# Altium PCB AudioHarmonizer.PcbDoc
Units mm, origin at the board's own origin, x right, y up, seen from the top; angles counter-clockwise.
Board outline 140.5 x 73 mm, 2 copper layers (Top Layer, Bottom Layer), stack 1.671 mm thick; 59 components, 39 nets, 253 pads, 55 vias.
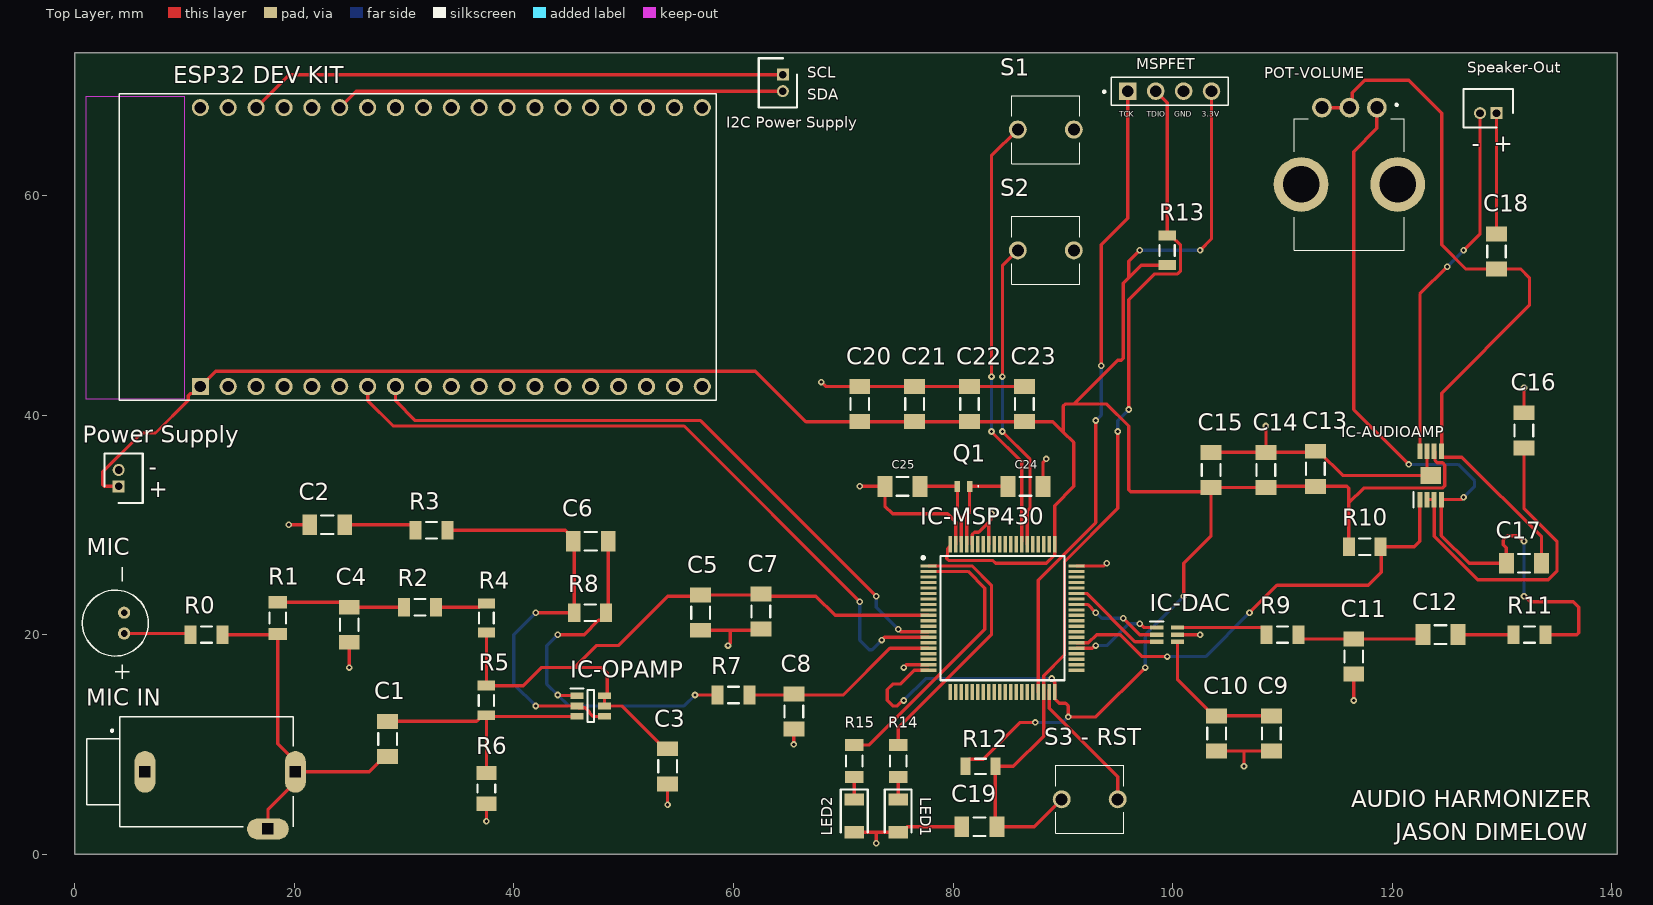
[diagram p0: Top Layer view]
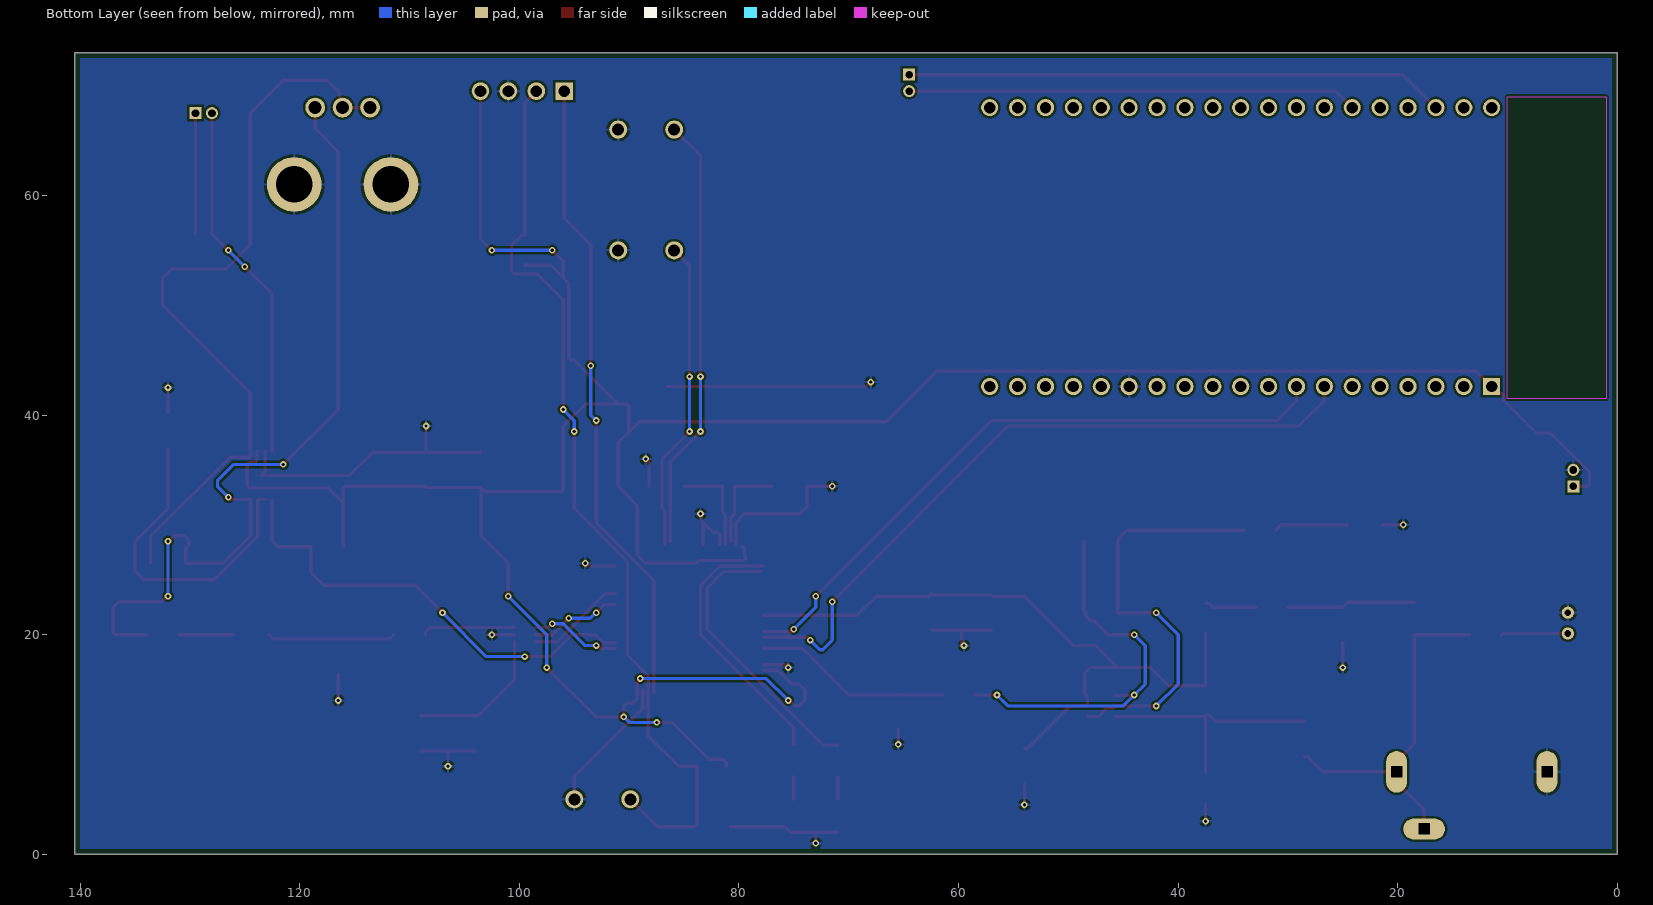
[diagram p1: Bottom Layer view, seen from below]

## Layer stack, top to bottom
Top Solder: solder mask 0.0102, Solder Resist, Dk 3.5
Top Layer: signal copper 0.0356
Dielectric 1: dielectric 1.6, FR-4, Dk 4.8
Bottom Layer: signal copper 0.0356
Bottom Solder: solder mask 0.0102, Solder Resist, Dk 3.5

## Board outline
0,0 0,73 140.5,73 140.5,0

## Design rules (kind name [scope] priority, off if disabled: settings)
Clearance [All] p1: gap=0.2 ignorepadtopadclearanceinfootprint=TRUE
Height [All] p1: minheight=0 maxheight=25.6 prefheight=12.7
HoleSize [All] p1: absolutevalues=TRUE maxlimit=3.35 minlimit=0.025 maxpercent=80.000 minpercent=20.000
MinimumSolderMaskSliver [All] p1: minsoldermaskwidth=0.046
PolygonConnect [All] p1: connectstyle=Relief reliefconductorwidth=0.254 reliefentries=4 polygonreliefangle="90 Angle" airgapwidth=0.254
RoutingVias [All] p1: holewidth=0.3 width=0.6 viastyle="Through Hole" minholewidth=0.3 minwidth=0.6 maxholewidth=0.3 maxwidth=0.6
SilkToSolderMaskClearance [IsPad] p1: minsilkscreentomaskgap=0.25 clearancetoexposedcopper=TRUE
SolderMaskExpansion [All] p1: expansion=0.102 istentingtop=FALSE
Width [All] p1: maxlimit=1 minlimit=0.3 preferedwidth=0.5
26 further rules are at their usual default settings.

## Components (designator, comment, footprint, x,y, rotation, side; value= is the part's Value field where it differs from the comment)
C1 "0.15u" CAPC1206(3216)170_M 28.5,10.5 r90 top value=6.8nF
C2 "0.47u" CAPC1206(3216)170_M 23,30 r0 top value=6.8nF
C3 "0.47u" CAPC1206(3216)170_M 54,8 r270 top value=6.8nF
C4 "4.7u" CAPC1206(3216)170_M 25,20.9 r270 top value=6.8nF
C5 "4.7u" CAPC1206(3216)170_M 57,22 r270 top value=6.8nF
C6 "51p" CAPC1206(3216)170_M 47,28.5 r0 top value=6.8nF
C7 "0.1u" CAPC1206(3216)170_M 62.5,22.1 r270 top value=6.8nF
C8 "0.015u" CAPC1206(3216)170_M 65.5,13 r270 top value=6.8nF
C9 "0.1u" CAPC1206(3216)170_M 109,11 r270 top value=6.8nF
C10 "10u" CAPC1206(3216)170_M 104,11 r270 top value=6.8nF
C11 "0.082u" CAPC1206(3216)170_M 116.5,18 r270 top value=6.8nF
C12 "0.56u" CAPC1206(3216)170_M 124.4,20 r0 top value=6.8nF
C13 "10u" CAPC1206(3216)170_M 113,35.1 r90 top value=6.8nF
C14 "0.1u" CAPC1206(3216)170_M 108.5,35 r90 top value=6.8nF
C15 "2.2u" CAPC1206(3216)170_M 103.5,35 r90 top value=6.8nF
C16 "2.2u" CAPC1206(3216)170_M 132,38.6 r90 top value=6.8nF
C17 "5p" CAPC1206(3216)170_M 132,26.5 r0 top value=6.8nF
C18 "47u" CAPC1206(3216)170_M 129.5,54.9 r90 top value=6.8nF
C19 "1n" CAPC1206(3216)170_M 82.4,2.5 r180 top value=6.8nF
C20 "100n" CAPC1206(3216)170_M 71.5,41 r90 top value=6.8nF
C21 "100n" CAPC1206(3216)170_M 76.5,41 r90 top value=6.8nF
C22 "100n" CAPC1206(3216)170_M 81.5,41 r90 top value=6.8nF
C23 "10u" CAPC1206(3216)170_M 86.5,41 r90 top value=6.8nF
C24 "22p" CAPC1206(3216)170_M 86.6,33.5 r0 top value=6.8nF
C25 "22p" CAPC1206(3216)170_M 75.4,33.5 r180 top value=6.8nF
"ESP32 DEV KIT" "ESP32-DEVKITC-32D" MODULE_ESP32-DEVKITC-32D 31.2,55.3 r90 top
"I2C Power Supply" "B2B-ZR_LF__SN_" SHDR2W50P0X150_1X2_450X350X450P 64.5,71 r90 top
IC-AUDIOAMP "TPA301DGN" SOP65P490X110-9N 123.5,34.5 r90 top
IC-DAC "DAC8311IDCKT" SOT65P210X110-6N 99.5,20 r0 top
IC-MSP430 "MSP430FR59941IPN" QFP50P1400X1400X160-80N 84.5,21.5 r0 top
IC-OPAMP "TLV2760IDBVTG4" SOT95P280X145-6N 47,13.5 r0 top
LED1 "HSMH-C150" LEDC3216X120N 75,3.5 r270 top
LED2 "HSMH-C150" LEDC3216X120N 71,3.5 r270 top
MIC "POM-2742P-2-R" MIC_POM-2742P-2-R 3.7,21.05 r270 top
"MIC IN" "MJ-3536N" CUI_MJ-3536N 12,7.5 r0 top
MSPFET "PPTC041LFBN-RC" SULLINS_PPTC041LFBN-RC 99.73,69.5 r0 top (schematic designator J1)
POT-VOLUME "PTV09A-4025F-B104" PTV09A4025FB104 118.6,68 r180 top (schematic designator POT)
"Power Supply" "B2B-ZR_LF__SN_" SHDR2W50P0X150_1X2_450X350X450P 4,33.5 r270 top
Q1 "ABS05-32.768KHZ-X-3-T3" ABS0532768KHZX3T3 80.95,33.5 r180 top (schematic designator "Q1 LF XTAL")
R0 "0" RESC3216X60X45NL10T20 12,20 r180 top
R1 "8.2K" RESC3216X60X45NL10T20 18.5,21.5 r90 top
R2 "470" RESC3216X60X45NL10T20 31.45,22.5 r0 top
R3 "820" RESC3216X60X45NL10T20 32.5,29.5 r0 top
R4 "3K" RESC3216X70X50LL05T20 37.5,21.5 r90 top
R5 "47K" RESC3216X60X45LL10T20 37.5,14 r90 top
R6 "51K" RESC3216X70X50NL20T25 37.5,6 r90 top
R7 "820" RESC3216X60X45NL10T20 60,14.5 r180 top
R8 "200K" RESC3216X60X45NL10T20 46.95,22 r0 top
R9 "100" RESC3216X60X45NL10T20 110,20 r0 top
R10 "100K" RESC3216X60X45NL10T20 117.5,28 r0 top
R11 "30K" RESC3216X60X45NL10T20 132.5,20 r0 top
R12 "47K" RESC3216X60X45LL10T20 82.5,8 r180 top
R13 "47K" RESC3216X60X45LL10T20 99.5,55 r270 top
R14 "470" RESC3216X60X45NL10T20 75,8.5 r270 top
R15 "470" RESC3216X60X45NL10T20 71,8.5 r270 top
S1 "FSM2JRT" FSM2JRT 85.895,66 r270 top
S2 "FSM2JRT" FSM2JRT 85.895,55 r270 top
"S3 - RST" "FSM2JRT" FSM2JRT 89.895,5 r270 top
Speaker-Out "B2B-ZR_LF__SN_" SHDR2W50P0X150_1X2_450X350X450P 129.5,67.5 r0 top

## Footprints (in the part's own frame and the unit in brackets; to place one, negate y for a bottom-side part, rotate by r counter-clockwise, add the part's x,y. Pads: shape width x height; smd on the part's side, far side on the other; paste and mask are expansions set on the pad)
ABS0532768KHZX3T3 [mm]
  rect 0.5x1 smd: 1(-0.55,0) 2(0.55,0)
  silkscreen extent -1.4,-0.05 -1.3,0.05, body extent -0.8,-0.5 0.8,0.5, height 0.6
CAPC1206(3216)170_M [mm] "Chip Capacitor, Body 3.2x1.6mm, Height 1.7mm, IPC Low Density"
  rect 1.35x1.9 smd: 1(-1.6,0) 2(1.6,0)
  silkscreen extent -0.55,-0.85 0.55,0.85, body extent -1.7,-0.9 1.7,0.9, height 1.7
CUI_MJ-3536N [mm]
  oval 1.9x3.8 hole 1 square: 1(-5.6,0) 2(8.1,0)
  oval 3.8x1.9 hole 1 square: 3(5.6,-5.2)
  silkscreen extent -10.9,-5 7.9,5
FSM2JRT [mm]
  round 1.638 hole 1.092: 1(0,0) 2(0,5.105)
  silkscreen extent -3.1,-0.55 3.1,5.65, body extent -3.1,-0.55 3.1,5.65, height 4.3
LEDC3216X120N [mm]
  rect 1.1x1.75 smd: 1(-1.5,0) 2(1.5,0)
  silkscreen extent -2.4,-1.23 1.5,1.23
MIC_POM-2742P-2-R [mm]
  round 1.108 hole 0.6: N(-0.95,0.8) P(0.95,0.8)
  silkscreen extent -5.08,-3 5.08,3, body extent -3,-1.45 3,4.15, height 3
MODULE_ESP32-DEVKITC-32D [mm]
  rect 1.56x1.56 hole 1.04: 1(-12.7,19.76)
  round 1.56 hole 1.04: 2(-12.7,17.22) 3(-12.7,14.68) 4(-12.7,12.14) 5(-12.7,9.6) 6(-12.7,7.06) 7(-12.7,4.52) 8(-12.7,1.98) 9(-12.7,-0.56) 10(-12.7,-3.1) 11(-12.7,-5.64) 12(-12.7,-8.18) 13(-12.7,-10.72) 14(-12.7,-13.26) 15(-12.7,-15.8) 16(-12.7,-18.34) 17(-12.7,-20.88) 18(-12.7,-23.42) 19(-12.7,-25.96) 20(12.7,19.76) 21(12.7,17.22) 22(12.7,14.68) 23(12.7,12.14) 24(12.7,9.6) 25(12.7,7.06) 26(12.7,4.52) 27(12.7,1.98) 28(12.7,-0.56) 29(12.7,-3.1) 30(12.7,-5.64) 31(12.7,-8.18) 32(12.7,-10.72) 33(12.7,-13.26) 34(12.7,-15.8) 35(12.7,-18.34) 36(12.7,-20.88) 37(12.7,-23.42) 38(12.7,-25.96)
  silkscreen extent -13.95,-27.25 13.95,27.15, body extent -13.97,-24.8 13.97,30.3, height 3.25
PTV09A4025FB104 [mm]
  round 1.8 hole 1.2: 1(0,0) 2(2.5,0) 3(5,0)
  round 4.98 hole 3.32: MH1(-1.9,7) MH2(6.9,7)
  silkscreen extent -2.5,-0.35 7.5,13, body extent -3.45,-0.5 8.46,13, height 25.6
QFP50P1400X1400X160-80N [mm]
  rect 1.475x0.3 smd: 1(-6.738,4.75) 2(-6.738,4.25) 3(-6.738,3.75) 4(-6.738,3.25) 5(-6.738,2.75) 6(-6.738,2.25) 7(-6.738,1.75) 8(-6.738,1.25) 9(-6.738,0.75) 10(-6.738,0.25) 11(-6.738,-0.25) 12(-6.738,-0.75) 13(-6.738,-1.25) 14(-6.738,-1.75) 15(-6.738,-2.25) 16(-6.738,-2.75) 17(-6.738,-3.25) 18(-6.738,-3.75) 19(-6.738,-4.25) 20(-6.738,-4.75) 41(6.738,-4.75) 42(6.738,-4.25) 43(6.738,-3.75) 44(6.738,-3.25) 45(6.738,-2.75) 46(6.738,-2.25) 47(6.738,-1.75) 48(6.738,-1.25) 49(6.738,-0.75) 50(6.738,-0.25) 51(6.738,0.25) 52(6.738,0.75) 53(6.738,1.25) 54(6.738,1.75) 55(6.738,2.25) 56(6.738,2.75) 57(6.738,3.25) 58(6.738,3.75) 59(6.738,4.25) 60(6.738,4.75)
  rect 0.3x1.475 smd: 21(-4.75,-6.738) 22(-4.25,-6.738) 23(-3.75,-6.738) 24(-3.25,-6.738) 25(-2.75,-6.738) 26(-2.25,-6.738) 27(-1.75,-6.738) 28(-1.25,-6.738) 29(-0.75,-6.738) 30(-0.25,-6.738) 31(0.25,-6.738) 32(0.75,-6.738) 33(1.25,-6.738) 34(1.75,-6.738) 35(2.25,-6.738) 36(2.75,-6.738) 37(3.25,-6.738) 38(3.75,-6.738) 39(4.25,-6.738) 40(4.75,-6.738) 61(4.75,6.738) 62(4.25,6.738) 63(3.75,6.738) 64(3.25,6.738) 65(2.75,6.738) 66(2.25,6.738) 67(1.75,6.738) 68(1.25,6.738) 69(0.75,6.738) 70(0.25,6.738) 71(-0.25,6.738) 72(-0.75,6.738) 73(-1.25,6.738) 74(-1.75,6.738) 75(-2.25,6.738) 76(-2.75,6.738) 77(-3.25,6.738) 78(-3.75,6.738) 79(-4.25,6.738) 80(-4.75,6.738)
  silkscreen extent -7.35,-5.65 5.65,5.65, body extent -7,-0.79 7,0.77, height 7
RESC3216X60X45LL10T20 [mm] "Chip Resistor, 2-Leads, Body 3.20x1.60mm, IPC High Density"
  rect 0.9x1.6 smd: 1(-1.35,0) 2(1.35,0)
  silkscreen extent -0.5,-0.7 0.5,0.7, body extent -1.65,-0.85 1.65,0.85, height 0.6
RESC3216X60X45NL10T20 [mm] "Chip Resistor, 2-Leads, Body 3.20x1.60mm, IPC Medium Density"
  rect 1.1x1.7 smd: 1(-1.45,0) 2(1.45,0)
  silkscreen extent -0.5,-0.75 0.5,0.75, body extent -1.65,-0.85 1.65,0.85, height 0.6
RESC3216X70X50LL05T20 [mm] "Chip Resistor, 2-Leads, Body 3.20x1.60mm, IPC High Density"
  rect 0.9x1.55 smd: 1(-1.325,0) 2(1.325,0)
  silkscreen extent -0.5,-0.67 0.5,0.68, body extent -1.63,-0.82 1.62,0.82, height 0.7
RESC3216X70X50NL20T25 [mm] "Chip Resistor, 2-Leads, Body 3.20x1.60mm, IPC Medium Density"
  rect 1.3x1.8 smd: 1(-1.4,0) 2(1.4,0)
  silkscreen extent -0.35,-0.8 0.35,0.8, body extent -1.7,-0.9 1.7,0.9, height 0.7
SHDR2W50P0X150_1X2_450X350X450P [mm]
  rect 1.1x1.1 hole 0.7: 1(0,0)
  round 1.1 hole 0.7: 2(-1.5,0)
  silkscreen extent -3,-1.3 1.5,2.2, body extent -3,-1.75 1.5,1.75, height 4.5
SOP65P490X110-9N [mm]
  rect 1.4x0.45 smd: 1(-2.2,0.975) 2(-2.2,0.325) 3(-2.2,-0.325) 4(-2.2,-0.975) 5(2.2,-0.975) 6(2.2,-0.325) 7(2.2,0.325) 8(2.2,0.975)
  rect 1.57x1.89 smd: 9(0,0)
  silkscreen extent -2.9,1.55 -1.5,1.55, body extent -2.45,-1.5 2.45,1.5, height 1.07
SOT65P210X110-6N [mm]
  rect 1.2x0.4 smd: 1(-0.95,0.65) 2(-0.95,0) 3(-0.95,-0.65) 4(0.95,-0.65) 5(0.95,0) 6(0.95,0.65)
  silkscreen extent -1.55,1.2 -0.35,1.2, body extent -1.05,-0.99 1.05,1.01, height 1
SOT95P280X145-6N [mm]
  rect 1.2x0.6 smd: 1(-1.25,0.95) 2(-1.25,0) 3(-1.25,-0.95) 4(1.25,-0.95) 5(1.25,0) 6(1.25,0.95)
  silkscreen extent -1.85,-1.45 0.3,1.6, body extent -1.4,-1.45 1.4,1.45, height 1.2
SULLINS_PPTC041LFBN-RC [mm]
  rect 1.605x1.605 hole 1.07: 1(-3.81,0)
  round 1.605 hole 1.07: 2(-1.27,0) 3(1.27,0) 4(3.81,0)
  silkscreen extent -6.06,-1.27 5.33,1.27

## Part data
C1 C2 C3 C4 C5 C6 C7 C8 C9 C10 C11 C12 C13 C14 C15 C16 C17 C18 C19 C20 C21 C22 C23 C24 C25: library part CMP-1037-03299-1, "CAP 6.8nF 50V ±10% 1206 (3216 Metric) Thickness 1.7mm SMD", Case-EIA=1206, Case-Metric=3216, Rated Voltage="50 V", Tolerance=Â±10%, Max Thickness="1.7 mm", Technology=SMT
"ESP32 DEV KIT": "EVAL BOARD FOR ESP-WROOM-32", Package=None, Availability=Warning, Check_prices=https://www.snapeda.com/parts/ESP32-DEVKITC-32D/Espressif%20Systems/view-part/2777395/?ref=eda, MF="Espressif Systems", MP=ESP32-DEVKITC-32D, Price=None, Purchase-URL=https://pricing.snapeda.com/search/part/ESP32-DEVKITC-32D/?ref=eda, SnapEDA_Link=https://www.snapeda.com/parts/ESP32-DEVKITC-32D/Espressif%20Systems/view-part/2777395/?ref=snap
"I2C Power Supply" "Power Supply" Speaker-Out: "Connector", Arrow Part Number=B2B-ZR(LF)(SN), Manufacturer_Name="JST (JAPAN SOLDERLESS TERMINALS)", Arrow Price/Stock=https://www.arrow.com/en/products/b2b-zr-lf-sn/jst-manufacturing, Datasheet Link=https://componentsearchengine.com/Datasheets/2/B2B-ZR(LF)(SN).pdf, Height=4.5mm, Manufacturer_Part_Number=B2B-ZR(LF)(SN)
IC-AUDIOAMP: "Integrated Circuit", Manufacturer_Name="Texas Instruments", Mouser2 Part Number=595-TPA301DGN, Datasheet Link=http://www.ti.com/lit/gpn/tpa301, Height=1.1mm, Manufacturer_Part_Number=TPA301DGN, Mouser2 Price/Stock=https://www.mouser.com/Search/Refine.aspx?Keyword=595-TPA301DGN
IC-DAC: "Integrated Circuit", Manufacturer_Name="Texas Instruments", Mouser2 Part Number=595-DAC8311IDCKT, Datasheet Link=http://www.ti.com/lit/gpn/dac8311, Height=1.1mm, Manufacturer_Part_Number=DAC8311IDCKT, Mouser2 Price/Stock=https://www.mouser.com/Search/Refine.aspx?Keyword=595-DAC8311IDCKT
IC-MSP430: "Integrated Circuit", Manufacturer_Name="Texas Instruments", Mouser2 Part Number=595-MSP430FR59941IPN, Datasheet Link=http://www.ti.com/lit/gpn/MSP430FR59941, Height=1.6mm, Manufacturer_Part_Number=MSP430FR59941IPN, Mouser2 Price/Stock=https://www.mouser.com/Search/Refine.aspx?Keyword=595-MSP430FR59941IPN
IC-OPAMP: "Integrated Circuit", Manufacturer_Name="Texas Instruments", Mouser2 Part Number=595-TLV2760IDBVTG4, Datasheet Link=https://www.ti.com/lit/ds/symlink/tlv2760.pdf?ts=1637756368752&ref_url=https%253A%252F%252Fwww.google.com%252F, Height=1.45mm, Manufacturer_Part_Number=TLV2760IDBVTG4, Mouser2 Price/Stock=https://www.mouser.com/Search/Refine.aspx?Keyword=595-TLV2760IDBVTG4
LED1 LED2: "LED", Manufacturer_Name="Avago Technologies", Mouser2 Part Number=630-HSMH-C150, Height=1.2mm, Manufacturer_Part_Number=HSMH-C150, Mouser2 Price/Stock=https://www.mouser.com/Search/Refine.aspx?Keyword=630-HSMH-C150
MIC: "ELECTRET CONDENSER MICROPHONE 6MM DIA", Package=None, Check_prices=https://www.snapeda.com/parts/POM-2742P-2-R/PUI+Audio/view-part/?ref=eda, Digi-Key_Part_Number=668-1160-ND, MF="PUI Audio", MP=POM-2742P-2-R, Purchase-URL=https://pricing.snapeda.com/search/part/POM-2742P-2-R/?ref=eda, SnapEDA_Link=https://www.snapeda.com/parts/POM-2742P-2-R/PUI+Audio/view-part/?ref=snap
"MIC IN": "3.5 mm, Mono, Right Angle, Through Hole, Audio Jack Connector", Package=None, Availability=Unavailable, MF="CUI Devices", MP=MJ-3536N, Price=None, SnapEDA_Link=https://www.snapeda.com/parts/MJ-3536N/CUI%20Devices/view-part/559067/?ref=snap
MSPFET: "4 Position Header Connector Through Hole", Package=None, Availability=Warning, Check_prices=https://www.snapeda.com/parts/PPTC041LFBN-RC/Sullins%20Connector%20Solutions/view-part/285917/?ref=eda, MF="Sullins Connector", MP=PPTC041LFBN-RC, Price=None, Purchase-URL=https://pricing.snapeda.com/search/part/PPTC041LFBN-RC/?ref=eda, SnapEDA_Link=https://www.snapeda.com/parts/PPTC041LFBN-RC/Sullins%20Connector%20Solutions/view-part/285917/?ref=snap
POT-VOLUME: "Variable Resistor", Manufacturer_Name=Bourns, Mouser2 Part Number=652-PTV09A4025FB104, Datasheet Link=https://componentsearchengine.com//PTV09A-4025F-B104.pdf, Height=25.5mm, Manufacturer_Part_Number=PTV09A-4025F-B104, Mouser2 Price/Stock=https://www.mouser.com/Search/Refine.aspx?Keyword=652-PTV09A4025FB104
Q1: "Crystal or Oscillator", Manufacturer_Name=ABRACON, Datasheet Link=https://abracon.com/Resonators/ABS05.pdf, Height=0.5mm, Manufacturer_Part_Number=ABS05-32.768KHZ-X-3-T3
R0 R1 R2 R3 R7 R8 R9 R10 R11 R14 R15: library part CMP-1014-00812-2, Manufacturer="Vishay Dale", Part Number=CRCW1206470KFKEA
R4: library part CMP-1014-00562-2, Manufacturer=Panasonic, Part Number=ERJ8ENF3001V
R5 R12 R13: library part CMP-2003-02213-1, Manufacturer="Vishay Dale", Part Number=CRCW120647K0FKEA
R6: library part CMP-2003-04477-1, Manufacturer=Panasonic, Part Number=ERA8AEB513V
S1 S2 "S3 - RST": "Switch (2-Pin Push)", Manufacturer_Name="TE Connectivity", Height=4.3mm, Manufacturer_Part_Number=FSM2JRT

## Via types
v1: diameter 0.6, hole 0.3, Top Layer to Bottom Layer, tented both sides, 55 vias

## Nets (pads, with @x,y where several pads share a name; then routed paths per layer and width w, separated by ;. In a path a pad name is that pad's centre, name@x,y a point inside that pad or via, vN(x,y) a via of type N, cw(c..) or ccw(c..) an arc to the next point about the centre after c; other vN are vias at no path point)
GND: "ESP32 DEV KIT.14" "MIC IN.1" "Power Supply.2" "S3 - RST.2" C2.1 C3.2 C4.2 C5.2 C7.2 C8.2 C9.2 C10.2 C11.2 C13.2 C14.2 C15.2 C16.2 C19.2 C20.2 C21.2 C22.2 C23.2 C24.2 C25.2 IC-AUDIOAMP.7 IC-AUDIOAMP.9 IC-DAC.5 IC-MSP430.19 IC-MSP430.39 IC-MSP430.60 IC-MSP430.73 IC-MSP430.76 IC-MSP430.79 LED1.2 LED2.2 MIC.N MSPFET.3 POT-VOLUME.MH1 POT-VOLUME.MH2 R6.1 S1.2 S2.2 | length 123.9
  Top Layer w0.3: v1(19.5,30) C2.1 ; v1(25,17) C4.2 ; v1(37.5,3) R6.1 ; v1(54,4.5) C3.2 ; C5.2 59.7,20.4 ; v1(59.5,19) 59.7,19.2 59.7,20.4 ; C7.2 62.4,20.4 59.7,20.4 ; v1(65.5,10) C8.2 ; v1(68,43) 68.4,42.6 C20.2 C21.2 C22.2 C23.2 ; LED2.2 73,2 ; v1(71.5,33.5) C25.2 73.8,31.7 74.5,31 79.5,31 80.25,30.25 IC-MSP430.79 ; v1(73,1) 73,2 ; v1(75.5,17) 75.75,17.25 IC-MSP430.19 ; C19.2 75.825,2.5 75.325,2 LED1.2 73,2 ; IC-MSP430.76 81.75,29.12 81.955,29.325 82.325,29.325 83.25,30.25 ; IC-MSP430.73 83.25,30.25 ; v1(83.5,31) 83.443,30.943 83.443,30.443 83.25,30.25 ; C24.2 88.2,35.7 v1(88.5,36) ; IC-MSP430.39@88.75,15 88.75,13.306 95,7.056 95,5 ; IC-MSP430.60 93.75,26.25 v1(94,26.5) ; IC-DAC.5 v1(102.5,20) ; C15.2 C14.2 ; C10.2 106.5,9.4 ; v1(106.5,8) 106.5,9.4 ; v1(108.5,39) C14.2 ; C9.2 106.5,9.4 ; v1(116.5,14) C11.2 ; IC-AUDIOAMP.7 123.175,34.825 IC-AUDIOAMP.9 115.475,34.5 113.375,36.6 C14.2 ; C16.2 v1(132,42.5)
NetC1_1: "MIC IN.2" "MIC IN.3" C1.1 R0.1 R1.1 | length 33.5
  Top Layer w0.3: R0.1 18.45,20 R1.1 18.5,10.05 20.1,8.45 20.1,7.5 ; 17.6,2.3 17.6,4.05 20.1,6.55 20.1,7.5 ; C1.1 28.225,8.9 26.825,7.5 20.1,7.5
NetC1_2: C1.2 IC-OPAMP.3 R5.1 R6.2 | length 22.8
  Top Layer w0.3: C1.2 36.6,12.1 37.15,12.65 R5.1 ; R6.2 R5.1 ; IC-OPAMP.3 37.6,12.55 R5.1
NetC2_2: C2.2 R3.1 | length 6.7
  Top Layer w0.3: C2.2 30.65,30 31.05,29.6 R3.1
NetC3_1: C3.1 C5.1 C7.1 IC-MSP430.10 IC-OPAMP.5 IC-OPAMP.6 R4.1 R5.2 | length 63.1
  Top Layer w0.3: R4.1 R5.2 40.85,15.35 42.5,17 45.5,17 ; C3.1 53.725,9.6 49.825,13.5 IC-OPAMP.5 IC-OPAMP.6 48.35,14.45 48.5,14.6 48.5,16.5 48,17 45.5,17 ; IC-MSP430.10 69.25,21.75 67.5,23.5 62.7,23.5 C7.1 62.4,23.6 C5.1 56.9,23.5 54,23.5 49.5,19 47.5,19 45.5,17
NetC4_1: C4.1 R1.2 R2.1 | length 11.7
  Top Layer w0.3: R1.2 24.55,22.95 C4.1 R2.1
NetC6_1: C6.1 IC-OPAMP.2 IC-OPAMP.4 R3.2 R8.1 | length 38.9
  Top Layer w0.3: R3.2 44.675,29.5 45.4,28.775 C6.1 45.5,28.4 R8.1 v1(42,22) ; v1(42,13.5) IC-OPAMP.2 45.9,13.35 46.486,13.35 46.868,12.968 46.868,12.882 47.2,12.55 IC-OPAMP.4
  Bottom Layer w0.3: v1(42,13.5) 40,15.5 40,20 v1(42,22)
NetC6_2: C6.2 IC-OPAMP.1 R7.2 R8.2 | length 35.5
  Top Layer w0.3: v1(44,14.5) 44.05,14.45 IC-OPAMP.1 ; v1(44,20) 46.4,20 47.7,21.3 48,21.3 48.4,21.7 R8.2 48.6,22.2 C6.2 ; v1(56.5,14.5) R7.2
  Bottom Layer w0.3: v1(44,20) 43,19 43,15.5 v1(44,14.5) 45,13.5 55.5,13.5 v1(56.5,14.5)
NetC8_1: C8.1 IC-MSP430.16 R7.1 | length 18.2
  Top Layer w0.3: R7.1 65.4,14.5 C8.1 65.6,14.5 70,14.5 74.25,18.75 IC-MSP430.16
NetC9_1: C9.1 C10.1 IC-DAC.4 | length 13.4
  Top Layer w0.3: IC-DAC.4 100.45,15.875 103.725,12.6 C10.1 C9.1
NetC11_1: C11.1 C12.1 R9.2 | length 11.7
  Top Layer w0.3: R9.2 111.85,19.6 C11.1 122.4,19.6 C12.1
NetC12_2: C12.2 R11.1 | length 5
  Top Layer w0.3: C12.2 R11.1
NetC13_1: "ESP32 DEV KIT.1" "Power Supply.1" C13.1 C14.1 C15.1 C20.1 C21.1 C22.1 C23.1 IC-AUDIOAMP.6 IC-MSP430.20 IC-MSP430.40 IC-MSP430.61 IC-MSP430.80 MSPFET.4 R10.1 R12.2 R13.2 | length 280.8
  Top Layer w0.3: 4,33.5 2.7,33.5 2.524,33.676 2.524,34.797 6.091,38.364 7.359,38.364 10.35,41.355 10.35,41.75 10.57,41.97 10.81,41.97 12.84,44 62,44 66.6,39.4 C20.1 C21.1 C22.1 C23.1 89.1,39.4 90.05,38.45 ; v1(75.5,14) 75.439,14 74.939,13.5 74.5,13.5 74,14 74,15 74.5,15.5 75.212,15.5 76.462,16.75 IC-MSP430.20 ; IC-MSP430.80@79.75,28 79.676,28 79.5,27.824 79.5,27.25 79.424,27.174 79.424,26.926 79.6,26.75 83.625,26.75 83.875,26.5 88.5,26.5 89.25,27.25 IC-MSP430.61 89.25,31.75 91,33.5 91,37.5 90.05,38.45 ; R12.2 81.15,8.35 81.45,8.65 82.755,8.65 86.105,12 v1(87.5,12) ; v1(89,16) 89,15.919 89.25,15.669 IC-MSP430.40 89.25,14.174 89.674,13.75 90.25,13.75 90.5,13.5 v1(90.5,12.5) 93,12.5 v1(97.5,17) ; v1(97,55) 96,54 96,52.5 ; R13.2 97.15,53.65 96,52.5 ; v1(101,23.5) 101,26.5 103.5,29 C15.1 ; v1(102.5,55) 103.54,56.04 MSPFET.4 ; R10.1 116.05,32 ; IC-AUDIOAMP.6 123.9,36.625 123.9,35.855 124.113,35.642 124.582,35.642 124.795,35.43 124.795,33.57 124.575,33.35 117.4,33.35 116.05,32 ; 90.05,38.45 90.05,40.824 90.226,41 91,41 ; 91,41 95,45 95.324,45 95.5,45.176 95.5,52 96,52.5 ; 91,41 94,41 96,39 96,33.176 96.176,33 103.1,33 C15.1 ; C15.1 C14.1 108.6,33.5 C13.1 115.874,33.5 116.05,33.324 116.05,32
  Bottom Layer w0.3: v1(75.5,14) 77.5,16 v1(89,16) ; v1(87.5,12) 90,12 v1(90.5,12.5) ; v1(97,55) v1(102.5,55) ; v1(97.5,17) 97.5,20 v1(101,23.5)
NetC16_1: C16.1 IC-AUDIOAMP.2 IC-AUDIOAMP.3 | length 29.6
  Top Layer w0.3: IC-AUDIOAMP.2 IC-AUDIOAMP.3 123.825,28.968 127.793,25 134.22,25 135,25.78 135,28.5 132,31.5 C16.1
NetC17_1: C17.1 IC-AUDIOAMP.4 POT-VOLUME.1 R11.2 | length 76.7
  Top Layer w0.3: POT-VOLUME.1 118.6,66.1 116.5,64 116.5,40.5 v1(121.5,35.5) ; v1(126.5,32.5) 126.3,32.3 IC-AUDIOAMP.4 124.475,29.025 127,26.5 C17.1 130.4,27.9 130.124,28.176 130.124,28.624 130.5,29 131.439,29 131.939,28.5 v1(132,28.5) ; v1(132,23.5) 132.061,23.5 132.561,23 136.5,23 137,22.5 137,20.176 136.824,20 R11.2
  Bottom Layer w0.3: v1(121.5,35.5) 126,35.5 127.5,34 127.5,33.5 v1(126.5,32.5) ; v1(132,23.5) v1(132,28.5)
NetC17_2: C17.2 C18.1 IC-AUDIOAMP.5 POT-VOLUME.2 POT-VOLUME.3 | length 69.2
  Top Layer w0.3: POT-VOLUME.3 POT-VOLUME.2 116.35,68.25 116.35,69.35 117.5,70.5 121.5,70.5 124.5,67.5 124.5,55.5 126.7,53.3 C18.1 131.7,53.3 132.5,52.5 132.5,50 124.5,42 124.5,36.725 IC-AUDIOAMP.5 124.475,36.225 124.55,36.15 126.35,36.15 133.6,28.9 C17.2
NetC18_2: C18.2 Speaker-Out.1 | length 11
  Top Layer w0.3: C18.2 Speaker-Out.1
NetC19_1: "S3 - RST.1" C19.1 IC-MSP430.38 MSPFET.2 R12.1 R13.1 | length 84.3
  Top Layer w0.3: 89.895,5 87.395,2.5 C19.1 83.85,2.65 R12.1 85.5,8 88.25,10.75 IC-MSP430.38 88.25,16.25 90.151,18.151 90.151,26.651 95,31.5 v1(95,38.5) ; v1(96,40.5) 96,50.5 98.35,52.85 100.445,52.85 100.726,53.131 100.726,55.474 99.85,56.35 R13.1 99.5,68.46 MSPFET.2
  Bottom Layer w0.3: v1(95,38.5) 95,39.5 v1(96,40.5)
NetC24_1: C24.1 IC-MSP430.77 Q1.1 | length 8.9
  Top Layer w0.3: IC-MSP430.77 81.25,30.913 81.5,31.163 Q1.1 C24.1
NetC25_1: C25.1 IC-MSP430.78 Q1.2 | length 8.5
  Top Layer w0.3: C25.1 Q1.2 80.4,31 80.75,30.65 IC-MSP430.78@80.75,28.5
"NetESP32 DEV KIT_7": "ESP32 DEV KIT.7" IC-MSP430.14 | length 64.3
  Top Layer w0.3: 26.68,42.6 26.68,41.32 29,39 55.5,39 v1(71.5,23) ; v1(73.5,19.5) 73.75,19.75 IC-MSP430.14
  Bottom Layer w0.3: v1(71.5,23) 71.5,19.5 72.376,18.624 72.624,18.624 v1(73.5,19.5)
"NetESP32 DEV KIT_8": "ESP32 DEV KIT.8" IC-MSP430.13 | length 59.2
  Top Layer w0.3: 29.22,42.6 29.22,41.28 31,39.5 57,39.5 v1(73,23.5) ; v1(75,20.5) 75.25,20.25 IC-MSP430.13
  Bottom Layer w0.3: v1(73,23.5) 73,22.5 v1(75,20.5)
"NetESP32 DEV KIT_22": "ESP32 DEV KIT.22" "I2C Power Supply.1" | length 49.2
  Top Layer w0.3: 16.52,68 19.52,71 64.5,71
"NetESP32 DEV KIT_25": "ESP32 DEV KIT.25" "I2C Power Supply.2" | length 41
  Top Layer w0.3: 24.14,68 25.64,69.5 64.5,69.5
NetIC-AUDIOAMP_1: IC-AUDIOAMP.1 IC-MSP430.46 R10.2 | length 42
  Top Layer w0.3: IC-MSP430.46 92.331,19.25 93.081,20 95.212,20 97.212,18 v1(99.5,18) ; v1(107,22) 109.5,24.5 117.824,24.5 119,25.676 119,27.95 R10.2 122,28 122.5,28.5 122.5,32.275 IC-AUDIOAMP.1
  Bottom Layer w0.3: v1(99.5,18) 103,18 v1(107,22)
NetIC-AUDIOAMP_8: IC-AUDIOAMP.8 Speaker-Out.2 | length 33.1
  Top Layer w0.3: IC-AUDIOAMP.8 122.525,51.025 v1(125,53.5) ; v1(126.5,55) 128,56.5 Speaker-Out.2
  Bottom Layer w0.3: v1(125,53.5) v1(126.5,55)
NetIC-DAC_1: IC-DAC.1 IC-MSP430.45 | length 8.4
  Top Layer w0.3: IC-MSP430.45 92.669,18.75 92.919,19 v1(93,19) ; v1(97,21) 97.35,20.65 IC-DAC.1
  Bottom Layer w0.3: v1(93,19) 94,19 96,21 v1(97,21)
NetIC-DAC_2: IC-DAC.2 IC-MSP430.53 | length 8.5
  Top Layer w0.3: IC-MSP430.53 92.25,22.75 v1(93,22) ; v1(95.5,21.5) 97,20 IC-DAC.2
  Bottom Layer w0.3: v1(93,22) 93.061,22 93.561,21.5 v1(95.5,21.5)
NetIC-DAC_3: IC-DAC.3 IC-MSP430.55 | length 9.1
  Top Layer w0.3: IC-MSP430.55 92.169,23.75 96.569,19.35 IC-DAC.3
NetIC-DAC_6: IC-DAC.6 R9.1 | length 8.5
  Top Layer w0.3: IC-DAC.6 108.15,20.65 108.55,20.25 R9.1
NetIC-MSP430_1: IC-MSP430.1 R14.1 | length 24.5
  Top Layer w0.3: R14.1 75,11.5 83.5,20 83.5,24.5 81.75,26.25 78.25,26.25 IC-MSP430.1
NetIC-MSP430_2: IC-MSP430.2 R15.1 | length 25.5
  Top Layer w0.3: R15.1 72.369,9.95 82.896,20.477 82.896,24.221 81.367,25.75 IC-MSP430.2@78,25.75
NetIC-MSP430_37: IC-MSP430.37 MSPFET.1 | length 58.1
  Top Layer w0.3: IC-MSP430.37 87.75,24.957 93,30.207 v1(93,39.5) ; v1(93.5,44.5) 93.5,55.504 95.92,57.924 MSPFET.1
  Bottom Layer w0.3: v1(93,39.5) 93.5,40 v1(93.5,44.5)
NetIC-MSP430_66: IC-MSP430.66 S2.1 | length 28.5
  Top Layer w0.3: v1(84.5,38.5) 87,36 87,31.5 86.75,31.25 IC-MSP430.66 ; v1(84.5,43.5) 84.5,53.605 S2.1
  Bottom Layer w0.3: v1(84.5,38.5) v1(84.5,43.5)
NetIC-MSP430_67: IC-MSP430.67 S1.1 | length 39.6
  Top Layer w0.3: v1(83.5,38.5) 86.25,35.75 IC-MSP430.67@86.25,28.5 ; v1(83.5,43.5) 83.5,63.605 S1.1
  Bottom Layer w0.3: v1(83.5,38.5) v1(83.5,43.5)
NetLED1_1: LED1.1 R14.2 | length 2.1
  Top Layer w0.3: LED1.1 R14.2
NetLED2_1: LED2.1 R15.2 | length 2.1
  Top Layer w0.3: LED2.1 R15.2
NetMIC_P: MIC.P R0.2 | length 6.1
  Top Layer w0.3: MIC.P 10.45,20.1 R0.2
NetR2_2: R2.2 R4.2 | length 4.7
  Top Layer w0.3: R2.2 36.85,22.5 37.175,22.825 R4.2
pads on no net: "ESP32 DEV KIT.2" "ESP32 DEV KIT.3" "ESP32 DEV KIT.4" "ESP32 DEV KIT.5" "ESP32 DEV KIT.6" "ESP32 DEV KIT.9" "ESP32 DEV KIT.10" "ESP32 DEV KIT.11" "ESP32 DEV KIT.12" "ESP32 DEV KIT.13" "ESP32 DEV KIT.15" "ESP32 DEV KIT.16" "ESP32 DEV KIT.17" "ESP32 DEV KIT.18" "ESP32 DEV KIT.19" "ESP32 DEV KIT.20" "ESP32 DEV KIT.21" "ESP32 DEV KIT.23" "ESP32 DEV KIT.24" "ESP32 DEV KIT.26" "ESP32 DEV KIT.27" "ESP32 DEV KIT.28" "ESP32 DEV KIT.29" "ESP32 DEV KIT.30" "ESP32 DEV KIT.31" "ESP32 DEV KIT.32" "ESP32 DEV KIT.33" "ESP32 DEV KIT.34" "ESP32 DEV KIT.35" "ESP32 DEV KIT.36" "ESP32 DEV KIT.37" "ESP32 DEV KIT.38" IC-MSP430.3 IC-MSP430.4 IC-MSP430.5 IC-MSP430.6 IC-MSP430.7 IC-MSP430.8 IC-MSP430.9 IC-MSP430.11 IC-MSP430.12 IC-MSP430.15 IC-MSP430.17 IC-MSP430.18 IC-MSP430.21 IC-MSP430.22 IC-MSP430.23 IC-MSP430.24 IC-MSP430.25 IC-MSP430.26 IC-MSP430.27 IC-MSP430.28 IC-MSP430.29 IC-MSP430.30 IC-MSP430.31 IC-MSP430.32 IC-MSP430.33 IC-MSP430.34 IC-MSP430.35 IC-MSP430.36 IC-MSP430.41 IC-MSP430.42 IC-MSP430.43 IC-MSP430.44 IC-MSP430.47 IC-MSP430.48 IC-MSP430.49 IC-MSP430.50 IC-MSP430.51 IC-MSP430.52 IC-MSP430.54 IC-MSP430.56 IC-MSP430.57 IC-MSP430.58 IC-MSP430.59 IC-MSP430.62 IC-MSP430.63 IC-MSP430.64 IC-MSP430.65 IC-MSP430.68 IC-MSP430.69 IC-MSP430.70 IC-MSP430.71 IC-MSP430.72 IC-MSP430.74 IC-MSP430.75

## Polygon pours and split planes (outlines as drawn)
GND on Bottom Layer "GND_L02_P000" (solid, pour order 0): 0.5,72.5 0.5,0.5 140,0.5 140,72.5

## Keep-outs
Top Layer:
  region: 1,69 1,41.5 10,41.5 10,69
Bottom Layer:
  region: 1,69 1,41.5 10,41.5 10,69

## Silkscreen, mask and mechanical layers (free items; w line width, h text height)
Top Overlay:
  text "SCL" at 66.7,70.7 h1
  text "SDA" at 66.7,68.7 h1
  text "TCK" at 95.15,67.15 h0.5
  text "TDIO" at 97.65,67.15 h0.5
  text "GND" at 100.15,67.15 h0.5
  text "3.3V" at 102.65,67.15 h0.5
  text "+" at 129.254,64 h1.52
  text "-" at 127.254,63.992 h1.52
  text "-" at 6.754,34.492 h1.52
  text "+" at 6.754,32.5 h1.52
  text "AUDIO HARMONIZER" at 116.254,4.254 h1.52
  text "JASON DIMELOW" at 120.254,1.254 h1.52
Board Outline:
  lines w0.1: 73,0 140.5,0
  lines w0.254: 0,0 0,73 140.5,73 140.5,0 0,0